# EAGLE board Parcial 1 (1) (EAGLE 7.6.0)

Size 73.58 x 1003.19 mm. Coordinates in mm from the lower left corner, seen from the top.
Outline: 0,0 56.82,0 56.82,53.33 0,53.33 0,0
Copper layers (1*16): Top 0.035mm / dielectric 1.5mm / Bottom 0.035mm
Design rules "default": minimum track width 10mil, minimum drill 24mil, track to track 8mil, track to pad 8mil, pad to pad 8mil, via to via 8mil, smd to smd 8mil, copper to edge 40mil, drill to drill 8mil, minimum pad ring 10mil, minimum via ring 8mil, stop-mask expansion 4mil, vias tented up to drill 0mil, thermal gap 10mil

## Footprints (pad centres in the part's own frame; a part is rotated, then mirrored left to right if it is on the bottom)
LED5MM = drill 0.813 octagon: A -1.27,0; K 1.27,0
0207/10 = drill 0.813 octagon: 1 -5.08,0; 2 5.08,0
DIL16 = drill 0.813 long: 1 -8.89,-3.81; 2 -6.35,-3.81; 3 -3.81,-3.81; 4 -1.27,-3.81; 5 1.27,-3.81; 6 3.81,-3.81; 7 6.35,-3.81; 8 8.89,-3.81; 9 8.89,3.81; 10 6.35,3.81; 11 3.81,3.81; 12 1.27,3.81; 13 -1.27,3.81; 14 -3.81,3.81; 15 -6.35,3.81; 16 -8.89,3.81
ARDUINO_UNO = drill 1.016 pad 1.88: 0 63.5,50.8; 1 60.96,50.8; 2 58.42,50.8; 3 55.88,50.8; 3.3V 35.56,2.54; 4 53.34,50.8; 5 50.8,50.8; 5V 38.1,2.54; 6 48.26,50.8; 7 45.72,50.8; 8 41.656,50.8; 9 39.116,50.8; 10 36.576,50.8; 11 34.036,50.8; 12 31.496,50.8; 13 28.956,50.8; A0 50.8,2.54; A1 53.34,2.54; A2 55.88,2.54; A3 58.42,2.54; A4 60.96,2.54; A5 63.5,2.54; AREF 23.876,50.8; GND 26.416,50.8; GND. 43.18,2.54; GND.. 40.64,2.54; I/OREF 30.48,2.54; N/C 27.94,2.54; RESET 33.02,2.54; SCL 18.796,50.8; SDA 21.336,50.8; VIN 45.72,2.54 | hole 3.2: 66.04,7.62; 66.04,35.56; 15.24,50.8; 13.97,2.54

## Placement (x,y rotation side)
D1  [LED5MM]  5,10.08 0 top
D2  [LED5MM]  5,22.78 0 top
D3  [LED5MM]  5,35.48 0 top
D4  [LED5MM]  5,48.18 0 top
D5  [LED5MM]  5,60.88 0 top
D6  [LED5MM]  5,73.58 0 top
D7  [LED5MM]  5,86.28 0 top
D8  [LED5MM]  5,98.98 0 top
D9  [LED5MM]  5,111.68 0 top
D10  [LED5MM]  5,124.38 0 top
D11  [LED5MM]  5,137.08 0 top
D12  [LED5MM]  5,149.78 0 top
D13  [LED5MM]  5,162.48 0 top
D14  [LED5MM]  5,175.18 0 top
D15  [LED5MM]  5,187.88 0 top
D16  [LED5MM]  5,200.58 0 top
D17  [LED5MM]  5,213.28 0 top
D18  [LED5MM]  5,225.98 0 top
D19  [LED5MM]  5,238.68 0 top
D20  [LED5MM]  5,251.38 0 top
D21  [LED5MM]  5,264.08 0 top
D22  [LED5MM]  5,276.78 0 top
D23  [LED5MM]  5,289.48 0 top
D24  [LED5MM]  5,302.18 0 top
D25  [LED5MM]  5,314.88 0 top
D26  [LED5MM]  5,327.58 0 top
D27  [LED5MM]  5,340.28 0 top
D28  [LED5MM]  5,352.98 0 top
D29  [LED5MM]  5,365.68 0 top
D30  [LED5MM]  5,378.38 0 top
D31  [LED5MM]  5,391.08 0 top
D32  [LED5MM]  5,403.78 0 top
D33  [LED5MM]  5,416.48 0 top
D34  [LED5MM]  5,429.18 0 top
D35  [LED5MM]  5,441.88 0 top
D36  [LED5MM]  5,454.58 0 top
D37  [LED5MM]  5,467.28 0 top
D38  [LED5MM]  5,479.98 0 top
D39  [LED5MM]  5,492.68 0 top
D40  [LED5MM]  5,505.38 0 top
D41  [LED5MM]  5,518.08 0 top
D42  [LED5MM]  5,530.78 0 top
D43  [LED5MM]  5,543.48 0 top
D44  [LED5MM]  5,556.18 0 top
D45  [LED5MM]  5,568.88 0 top
D46  [LED5MM]  5,581.58 0 top
D47  [LED5MM]  5,594.28 0 top
D48  [LED5MM]  5,606.98 0 top
D50  [LED5MM]  5,619.68 0 top
D51  [LED5MM]  5,632.38 0 top
D52  [LED5MM]  5,645.08 0 top
D53  [LED5MM]  5,657.78 0 top
D54  [LED5MM]  5,670.48 0 top
D55  [LED5MM]  5,683.18 0 top
D56  [LED5MM]  5,695.88 0 top
D57  [LED5MM]  5,708.58 0 top
D58  [LED5MM]  5,721.28 0 top
D59  [LED5MM]  5,733.98 0 top
D60  [LED5MM]  5,746.68 0 top
D61  [LED5MM]  5,759.38 0 top
D62  [LED5MM]  5,772.08 0 top
D63  [LED5MM]  5,784.78 0 top
D64  [LED5MM]  5,797.48 0 top
D65  [LED5MM]  5,810.18 0 top
R2  560‎Ω  [0207/10]  5,822.88 0 top
R3  560‎Ω  [0207/10]  5,835.58 0 top
R4  560‎Ω  [0207/10]  5,848.28 0 top
R5  560‎Ω  [0207/10]  5,860.98 0 top
R6  560‎Ω  [0207/10]  5,873.68 0 top
R7  560‎Ω  [0207/10]  5,886.38 0 top
R8  560‎Ω  [0207/10]  5,899.08 0 top
R9  560‎Ω  [0207/10]  5,911.78 0 top
U1  [DIL16]  5,924.48 0 top
U2  [DIL16]  5,937.18 0 top
U3  [ARDUINO_UNO]  5,949.88 0 top

## Library data of the parts
D1-D48 D50-D65 R2-R9 U1-U3 = AUTODESK_CIRCUITS_BREADBOARD

## Nets
N$1: D1.K D2.K D3.K D4.K D5.K D6.K D7.K D8.K U2.15
N$2: D9.K D11.K D14.K D15.K D17.K D18.K D19.K D20.K U2.1
N$3: D25.K D26.K D27.K D28.K D29.K D30.K D31.K D32.K U2.3
N$4: D10.K D12.K D13.K D16.K D21.K D22.K D23.K D24.K U2.2
N$5: D33.K D34.K D35.K D36.K D37.K D38.K D39.K D40.K U2.4
N$6: D50.K D51.K D52.K D53.K D54.K D55.K D56.K D57.K U2.6
N$7: D58.K D59.K D60.K D61.K D62.K D63.K D64.K D65.K U2.7
N$8: D1.A D9.A D10.A D25.A D33.A D41.A D50.A D58.A R2.2
N$9: D2.A D11.A D12.A D26.A D34.A D42.A D51.A D59.A R3.2
N$10: D3.A D13.A D14.A D27.A D35.A D43.A D52.A D60.A R4.2
N$11: D4.A D15.A D16.A D28.A D36.A D44.A D53.A D61.A R5.2
N$12: D5.A D17.A D21.A D29.A D37.A D45.A D54.A D62.A R6.2
N$13: D6.A D18.A D22.A D30.A D38.A D46.A D55.A D63.A R7.2
N$14: D7.A D19.A D23.A D31.A D39.A D47.A D56.A D64.A R8.2
N$15: D8.A D20.A D24.A D32.A D40.A D48.A D57.A D65.A R9.2
N$16: R3.1 U1.1
N$17: R6.1 U1.4
N$18: R8.1 U1.6
N$19: R4.1 U1.2
N$20: U1.8 U1.13 U2.8 U2.13 U3.GND
N$21: U1.10 U1.16 U2.10 U2.16 U3.5V
N$22: U1.12 U3.4
N$23: R7.1 U1.5
N$24: R5.1 U1.3
N$25: U1.9
N$26: U1.11 U3.5
N$27: U2.12 U3.11
N$28: D41.K D42.K D43.K D44.K D45.K D46.K D47.K D48.K U2.5
N$29: U2.9
N$30: U2.11 U3.12
N$31: R2.1 U1.15
N$32: U1.14 U3.3
N$33: R9.1 U1.7
N$34: U2.14 U3.10

## Tracks (layer width: path | path; a pad name or v marks a point on that pad's centre or on a via)
N$1  (8 unrouted)
N$2  (8 unrouted)
N$3  (8 unrouted)
N$4  (8 unrouted)
N$5  (8 unrouted)
N$6  (8 unrouted)
N$7  (8 unrouted)
N$8  (8 unrouted)
N$9  (8 unrouted)
N$10  (8 unrouted)
N$11  (8 unrouted)
N$12  (8 unrouted)
N$13  (8 unrouted)
N$14  (8 unrouted)
N$15  (8 unrouted)
N$16  (1 unrouted)
N$17  (1 unrouted)
N$18  (1 unrouted)
N$19  (1 unrouted)
N$20  (4 unrouted)
N$21  (4 unrouted)
N$22  (1 unrouted)
N$23  (1 unrouted)
N$24  (1 unrouted)
N$26  (1 unrouted)
N$27  (1 unrouted)
N$28  (8 unrouted)
N$30  (1 unrouted)
N$31  (1 unrouted)
N$32  (1 unrouted)
N$33  (1 unrouted)
N$34  (1 unrouted)